# EAGLE board AD7173 (EAGLE 6.5.0)
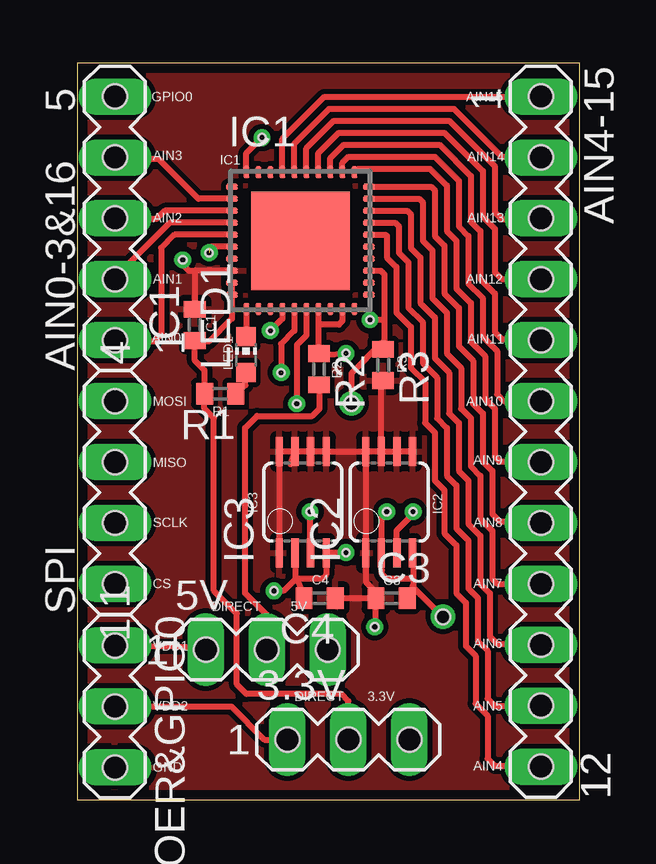
[diagram p0: board, top side]
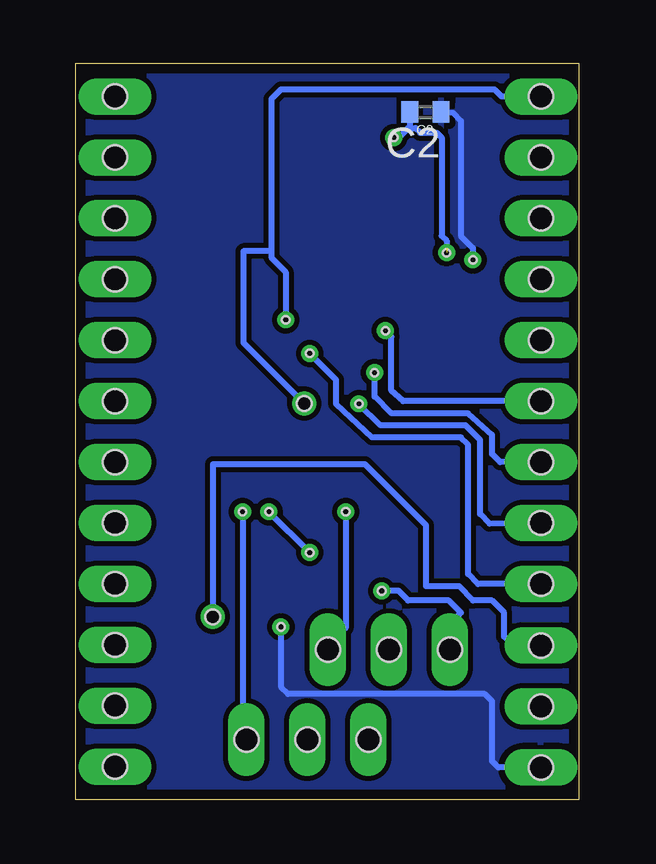
[diagram p1: board, bottom side, seen from below]

Size 20.94 x 30.69 mm. Coordinates in mm from the lower left corner, seen from the top.
Outline: 0,0 20.94,0 20.94,30.69 0,30.69 0,0
Copper layers (1*16): Top 0.035mm / dielectric 1.5mm / Bottom 0.035mm
Design rules "AD7173 *": minimum track width 10mil, minimum drill 24mil, track to track 0.205mm, track to pad 0.205mm, pad to pad 0.205mm, via to via 0.205mm, smd to smd 8mil, copper to edge 0.416mm, drill to drill 8mil, minimum pad ring 10mil, minimum via ring 8mil, stop-mask expansion 4mil, vias tented up to drill 0mil, thermal gap 10mil
Net classes: 0 default: clearance 0.205 mm
Holes 1 mm at 1.57,1.34 1.57,3.88 1.57,6.42 1.57,8.99 1.57,11.53 1.57,14.07 5.36,6.25 7.9,6.25 10.44,6.25 8.76,2.5 11.3,2.5 13.84,2.5 19.32,1.37 19.32,3.91 19.32,6.45 19.32,8.99 19.32,11.53 19.32,14.07 19.32,16.61 19.32,19.15 19.32,21.69 19.32,24.23 1.57,19.15 1.57,16.61 1.57,24.23 1.57,21.69 1.57,26.77 1.57,29.31 19.32,29.31 19.32,26.77
Holes 0.6 mm at 11.43,16.51 15.24,7.62
Holes 0.3 mm at 12.9,12 14,12 9.7,12 11.2,10.3 8.2,8.7 12.4,7.2 9.15,16.5 8.5,17.8 11.2,18.6 12.2,20 8.05,19.55 5.5,22.8 4.4,22.5 7.7,27.6

## Footprints (pad centres in the part's own frame; a part is rotated, then mirrored left to right if it is on the bottom)
MA03-1 = drill 1.016 long: 1 -2.54,0; 2 0,0; 3 2.54,0
MA05-1 = drill 1.016 long: 1 -5.08,0; 2 -2.54,0; 3 0,0; 4 2.54,0; 5 5.08,0
MA12-1 = drill 1.016 long: 1 -13.97,0; 2 -11.43,0; 3 -8.89,0; 4 -6.35,0; 5 -3.81,0; 6 -1.27,0; 7 1.27,0; 8 3.81,0; 9 6.35,0; 10 8.89,0; 11 11.43,0; 12 13.97,0
C0402 = smd 0.7 x 0.9: 1 -0.65,0; 2 0.65,0
LFCSP_WQ6X6MM = smd 0.5 x 0.25: 1 -2.85,2.25; 2 -2.85,1.75; 3 -2.85,1.25; 4 -2.85,0.75; 5 -2.85,0.25; 6 -2.85,-0.25; 7 -2.85,-0.75; 8 -2.85,-1.25; 9 -2.85,-1.75; 10 -2.85,-2.25; 21 2.85,-2.25; 22 2.85,-1.75; 23 2.85,-1.25; 24 2.85,-0.75; 25 2.85,-0.25; 26 2.85,0.25; 27 2.85,0.75; 28 2.85,1.25; 29 2.85,1.75; 30 2.85,2.25 | smd 0.25 x 0.5: 11 -2.25,-2.85; 12 -1.75,-2.85; 13 -1.25,-2.85; 14 -0.75,-2.85; 15 -0.25,-2.85; 16 0.25,-2.85; 17 0.75,-2.85; 18 1.25,-2.85; 19 1.75,-2.85; 20 2.25,-2.85; 31 2.25,2.85; 32 1.75,2.85; 33 1.25,2.85; 34 0.75,2.85; 35 0.25,2.85; 36 -0.25,2.85; 37 -0.75,2.85; 38 -1.25,2.85; 39 -1.75,2.85; 40 -2.25,2.85 | smd 4.1 x 4.1: EXP 0,0
MSOP08 = smd 0.3 x 1.2: 1 -0.976,-2.113; 2 -0.326,-2.113; 3 0.324,-2.113; 4 0.974,-2.113; 5 0.974,2.112; 6 0.324,2.112; 7 -0.326,2.112; 8 -0.976,2.112
CHIP-LED0603 = smd 0.8 x 0.8: A 0,-0.75; C 0,0.75
R0402 = smd 0.7 x 0.9: 1 -0.65,0; 2 0.65,0
MA04-1 = drill 1.016 long: 1 -3.81,0; 2 -1.27,0; 3 1.27,0; 4 3.81,0

## Placement (x,y rotation side)
3.3V  [MA03-1]  11.3,2.5 0 top
5V  [MA03-1]  7.9,6.25 0 top
AIN0-3&16  [MA05-1]  1.57,24.23 90 top
AIN4-15  [MA12-1]  19.32,15.34 270 top
C1  0.1uF  [C0402]  4.9,19.79 90 top
C2  0.1uF  [C0402]  6.38,28.66 180 bottom
C3  0.1uF  [C0402]  13.1,8.4 0 top
C4  0.1uF  [C0402]  10.1,8.4 180 top
IC1  AD7173  [LFCSP_WQ6X6MM]  9.3,23.3 0 top
IC2  LM3485  [MSOP08]  13,12.4 0 top
IC3  LM3485  [MSOP08]  9.4,12.4 0 top
LED1  [CHIP-LED0603]  7.03,18.55 0 top
PWOER&GPIO0  [MA03-1]  1.57,3.88 270 top
R1  10k  [R0402]  5.96,16.92 180 top
R2  10k  [R0402]  10.08,17.94 270 top
R3  10k  [R0402]  12.75,18.12 270 top
SPI  [MA04-1]  1.57,12.8 90 top

## Library data of the parts
3.3V 5V AIN0-3&16 AIN4-15 PWOER&GPIO0 SPI = con-lstb; OC_FARNELL: unknown; OC_NEWARK: unknown
C1-C4 R1-R3 = rcl
IC1 = AD7173; MPN: MRF24J40-I/ML; OC_FARNELL: 1436019; OC_NEWARK: 17M0699
IC2 IC3 = linear
LED1 = led

## Nets
+3V3: 5V.2 R2.2
+5V: 3.3V.2 C1.1 IC1.9 IC1.10 R1.2
AIN16: IC1.1
DGND: IC1.21
GND: C1.2 C2.1 C3.1 C4.1 IC1.8 IC2.1 IC2.5 IC2.6 IC2.7 IC2.8 IC3.1 IC3.5 IC3.6 IC3.7 IC3.8 PWOER&GPIO0.3 R3.2
GPIO1: IC1.24
GPIO2: IC1.25
N$1: LED1.A R1.1
N$3: IC1.17 IC1.19 R2.1 SPI.1
N$4: AIN4-15.1 IC1.37
N$5: AIN0-3&16.5 IC1.23 R3.1
N$6: C2.2 IC1.6 IC1.40
N$7: AIN4-15.2 IC1.36
N$8: AIN4-15.3 IC1.35
N$9: AIN4-15.4 IC1.34
N$10: AIN4-15.5 IC1.33
N$11: AIN4-15.6 IC1.32
N$12: AIN4-15.7 IC1.31
N$13: AIN4-15.8 IC1.30
N$14: AIN4-15.9 IC1.29
N$15: AIN4-15.10 IC1.28
N$16: AIN4-15.11 IC1.27
N$17: AIN4-15.12 IC1.26
N$18: AIN0-3&16.1 IC1.5
N$19: AIN0-3&16.2 IC1.4
N$20: AIN0-3&16.3 IC1.3
N$21: AIN0-3&16.4 IC1.2
N$22: 3.3V.1 PWOER&GPIO0.2
N$23: IC1.14 SPI.4
N$24: IC1.15 SPI.3
N$25: IC1.16 SPI.2
N$27: 5V.1 C3.2 C4.2 IC2.2 IC2.4 IC3.2 IC3.4 PWOER&GPIO0.1
REF-: IC1.39
REGCAPD: IC1.22
SPI: IC1.11 LED1.C

## Tracks (layer width: path | path; a pad name or v marks a point on that pad's centre or on a via)
+3V3
  Top 0.254: R2.2 10.1,17.27 10.1,16.3 9.8,16 7.5,16 7,15.5 7,8.6 7.9,7.7 5V.2
+5V
  Top 0.254: IC1.9 IC1.10 6.45,20.05 5.5,19.1 4.94,19.1 C1.1 4.9,18.3 5.31,17.89 R1.2 5.3,16.3 5.7,15.9 5.7,8.7 6.65,7.75 6.65,4.8 7.05,4.4 11,4.4 11.3,4.1 3.3V.2
GND  (via drill 0.3 pad 0.01)  (1 unrouted)
  Top 0.254: IC2.7 12.67,17.39 R3.2 | IC2.5 IC2.6 IC2.7 | IC2.7 IC2.8 | IC2.8 IC2.1 12.02,9.08 12.4,8.7 12.4,8.65 C3.1 | IC3.7 IC3.6 IC3.5 IC2.8 | IC3.7 IC3.8 IC3.1 | IC1.8 4.9,22.05 | 4.9,22.05 4.65,22.05 4.4,22.3 4.4,22.5 | 4.9,22.05 C1.2 | C4.1 C3.1 | C3.1 12.4,8.35 | v12.4,7.2 12.45,7.25 C3.1 | 8.89,13.97 IC3.7
  Bottom 0.254: C2.1 5.23,28.63 4.9,28.3 4.9,23.5 4.4,23 4.4,22.5 | PWOER&GPIO0.3 3.34,1.34 3.6,1.6 3.6,4.1 3.9,4.4 12.1,4.4 12.4,4.7 v12.4,7.2
  pour Top: 0,30.7 21,30.7 21,0 0,0
  pour Bottom: 0,30.7 20.9,30.7 20.9,0 0,0
N$1
  Top 0.254: R1.1 7.01,17.28 LED1.A
N$2  (via drill 0.3 pad 0.01)
  Top 0.254: v9.7,12 9.7,10.1
  Bottom 0.254: v9.7,12 9.7,7.15 10.5,6.35
N$3  (1 unrouted)
  Top 0.254: IC1.17 10.05,19.8 | 10.05,19.8 10.05,18.82 R2.1 10.34,18.55 11.2,18.6 | IC1.19 11.05,19.95 10.9,19.8 10.05,19.8
  Bottom 0.254: SPI.1 4.19,8.99 4.6,9.4 4.6,14.8 4.9,15.1 8.6,15.1 10.1,16.5 10.1,17.5 11.2,18.6
N$4
  Top 0.254: IC1.37 8.55,27.55 10.3,29.3 AIN4-15.1
N$5  (via drill 0.61)
  Top 0.254: IC1.23 12.65,22.05 12.8,21.9 12.8,20 | 12.8,20 12.8,18.82 R3.1 12.7,19.05 11.43,17.78 v11.43,16.51 | 12.8,20 12.2,20
  Bottom 0.254: AIN0-3&16.5 3.21,29.31 3.5,29.6 12.4,29.6 12.8,29.2 12.8,22.86 | 12.8,22.86 12.8,22.6 12.2,22 12.2,20 | v11.43,16.51 13.97,19.05 13.97,22.86 12.8,22.86
N$6  (2 unrouted)
  Top 0.254: IC1.40 7.05,26.95 7.7,27.6 | IC1.6 5.55,23.05 5.5,23
  Bottom 0.254: C2.2 7.03,28.07 7.1,28 | 7.1,28 6.8,28 6.6,27.8 5.9,27.8 5.7,27.6 5.7,23.5 5.5,23.3 5.5,22.8 | 7.1,28 7.5,27.6 7.7,27.6
N$7
  Top 0.254: IC1.36 9.05,27.35 10.5,28.8 15.7,28.8 17.7,26.8 19.29,26.8 AIN4-15.2
N$8
  Top 0.254: IC1.35 9.55,27.15 10.7,28.3 15.5,28.3 17.4,26.4 17.4,24.5 17.7,24.2 19.29,24.2 AIN4-15.3
N$9
  Top 0.254: IC1.34 10.05,26.95 10.9,27.8 15.3,27.8 16.9,26.2 16.9,24.3 17.4,23.8 17.4,22 17.7,21.7 AIN4-15.4
N$10
  Top 0.254: IC1.33 10.55,26.75 11.1,27.3 15.1,27.3 16.4,26 16.4,24.1 16.8,23.7 16.8,21.7 17.4,21.1 17.4,19.5 17.7,19.2 19.27,19.2 AIN4-15.5
N$11
  Top 0.254: IC1.32 11.05,26.55 11.3,26.8 14.9,26.8 15.9,25.8 15.9,23.9 16.3,23.5 16.3,21.5 16.9,20.9 16.9,19.3 17.5,18.7 17.5,16.9 17.8,16.6 AIN4-15.6
N$12
  Top 0.254: IC1.31 11.7,26.3 14.7,26.3 15.4,25.6 15.4,23.7 15.8,23.3 15.8,21.3 16.4,20.7 16.4,19.1 17,18.5 17,16.7 17.4,16.3 17.4,14.3 17.6,14.1 19.29,14.1 AIN4-15.7
N$13
  Top 0.254: IC1.30 14.75,25.55 14.9,25.4 14.9,23.5 15.3,23.1 15.3,21.1 15.9,20.5 15.9,18.9 16.5,18.3 16.5,16.5 16.9,16.1 16.9,14.1 17.3,13.7 17.3,11.9 17.6,11.6 19.25,11.6 AIN4-15.8
N$14
  Top 0.254: IC1.29 14.25,25.05 14.4,24.9 14.4,23.3 14.8,22.9 14.8,20.9 15.4,20.3 15.4,18.6 16,18 16,16.3 16.4,15.9 16.4,13.9 16.8,13.5 16.8,11.7 17.3,11.2 17.3,9.2 17.5,9 AIN4-15.9
N$15
  Top 0.254: IC1.28 13.75,24.55 13.9,24.4 13.9,23 14.3,22.6 14.3,20.7 14.9,20.1 14.9,18.4 15.5,17.8 15.5,16.1 15.9,15.7 15.9,13.7 16.3,13.3 16.3,11.5 16.8,11 16.8,9 17.2,8.6 17.2,6.8 17.5,6.5 19.27,6.5 AIN4-15.10
N$16
  Top 0.254: IC1.27 13.25,24.05 13.4,23.9 13.4,22.8 13.8,22.4 13.8,20.5 14.4,19.9 14.4,18.2 15,17.6 15,15.9 15.4,15.5 15.4,13.5 15.8,13.1 15.8,11.3 16.3,10.8 16.3,8.8 16.7,8.4 16.7,6.6 17.1,6.2 17.1,4.2 17.4,3.9 AIN4-15.11
N$17
  Top 0.254: IC1.26 12.85,23.55 12.9,23.5 12.9,22.6 13.3,22.2 13.3,20.3 13.9,19.7 13.9,18 14.5,17.4 14.5,15.7 14.9,15.3 14.9,13.3 15.3,12.9 15.3,11.1 15.8,10.6 15.8,8.6 16.2,8.2 16.2,6.4 16.6,6 16.6,4 17.1,3.5 17.1,1.7 17.4,1.4 19.29,1.4 AIN4-15.12
N$18
  Top 0.254: IC1.5 4.05,23.55 3.5,23 3.5,19.4 3.2,19.1 1.62,19.1 AIN0-3&16.1
N$19
  Top 0.254: IC1.4 3.85,24.05 1.5,21.7 AIN0-3&16.2
N$20
  Top 0.254: IC1.3 3.65,24.55 3.3,24.2 1.6,24.2 AIN0-3&16.3
N$21
  Top 0.254: IC1.2 5.05,25.05 3.4,26.7 1.64,26.7 AIN0-3&16.4
N$22
  Top 0.254: PWOER&GPIO0.2 6.42,3.88 7.8,2.5 3.3V.1
N$23  (1 unrouted)
  Top 0.254: IC1.14 8.55,20.05 8.05,19.55
  Bottom 0.254: SPI.4 7.31,16.61 7.8,17.05 7.8,19.3 8.05,19.55
N$24  (1 unrouted)
  Top 0.254: IC1.15 9.05,19.55 8.5,19 8.5,17.8
  Bottom 0.254: SPI.3 3.27,14.07 3.6,14.4 3.6,15.2 4.6,16.1 7.8,16.1 8.5,16.8 8.5,17.8
N$25  (1 unrouted)
  Top 0.254: IC1.16 9.55,19.35 9.15,18.95 9.15,16.5
  Bottom 0.254: SPI.2 3.7,11.5 4.1,11.9 4.1,15 4.7,15.6 8.25,15.6 9.15,16.5
N$26  (via drill 0.3 pad 0.01)
  Top 0.254: v14,12 14,11.9 13.3,11.2 13.3,10.4
  Bottom 0.254: v14,12 14,2.7 13.8,2.5
N$27  (via drill 0.61)  (1 unrouted)
  Top 0.254: IC2.4 13.97,10.57 14,9.2 | 14,9.2 12.9,9.2 12.7,9.4 12.7,9.56 IC2.2 12.7,10.31 12.7,11.8 12.9,12 | 13.8,8.55 C3.2 13.8,8.65 13.8,8.6 14,8.8 14,8.89 | 14,9.2 14,8.89 | 9.1,9.2 10.2,9.2 10.37,9.37 IC3.4 10.39,10.3 11.2,10.3 | 9.1,9.3 9.1,10.26 IC3.2 | 9.5,8.4 9.5,8.45 C4.2 9.5,8.35 9.5,8.4 | 9.1,9.2 9.1,9.3 | 9.1,9.3 9.5,8.4 | PWOER&GPIO0.1 5.24,6.37 5V.1 | 9.1,9.2 8.6,8.7 8.2,8.7 | v15.24,7.62 13.97,8.89 14,8.89
  Bottom 0.254: 5V.1 5.8,6.65 4.9,7.8 5.4,8.3 7.1,8.3 7.5,8.7 8.2,8.7 | v15.24,7.62 15.24,13.97 8.89,13.97 6.35,11.43 6.35,8.89 4.98,8.89 4.4,8.3 3.6,8.3 3.1,7.8 3.1,6.8 2.74,6.45 PWOER&GPIO0.1
N$28  (via drill 0.3)
  other vias: 4.4,22.5
N$29  (via drill 0.3)
  other vias: 5.5,22.8
N$30  (via drill 0.3)
  other vias: 12.2,20
N$31  (via drill 0.3)
  other vias: 11.2,18.6
N$32  (via drill 0.3 pad 0.01)
  other vias: 8.2,8.7
N$33  (via drill 0.3 pad 0)
  other vias: 8.05,19.55
N$34  (via drill 0.3 pad 0.01)
  Bottom 0.254: v12.9,12 v11.2,10.3
N$35  (via drill 0.3 pad 0)
  other vias: 9.15,16.5
N$36  (via drill 0.3 pad 0.01)
  other vias: 7.7,27.6
N$37  (via drill 0.3 pad 0)
  other vias: 8.5,17.8
SPI
  Top 0.254: IC1.11 7.05,19.32 LED1.C

## Text on the board
_tNames: GPIO0 | AIN15 | AIN3 | AIN14 | IC1 | AIN2 | AIN13 | AIN1 | AIN12 | C1 | AIN0 | R3 | AIN11 | LED1 | R2 | MOSI | R1 | AIN10 | MISO | AIN9 | IC3 | IC2 | SCLK | AIN8 | CS | C4 | C3 | AIN7 | DIRECT | 5V | VDD1 | AIN6 | VDD2 | DIRECT | 3.3V | AIN5 | GND | AIN4
_bNames: C2